# EAGLE board CarrerAI_BB_V1.0 (EAGLE 7.7.0), part 1 of 2
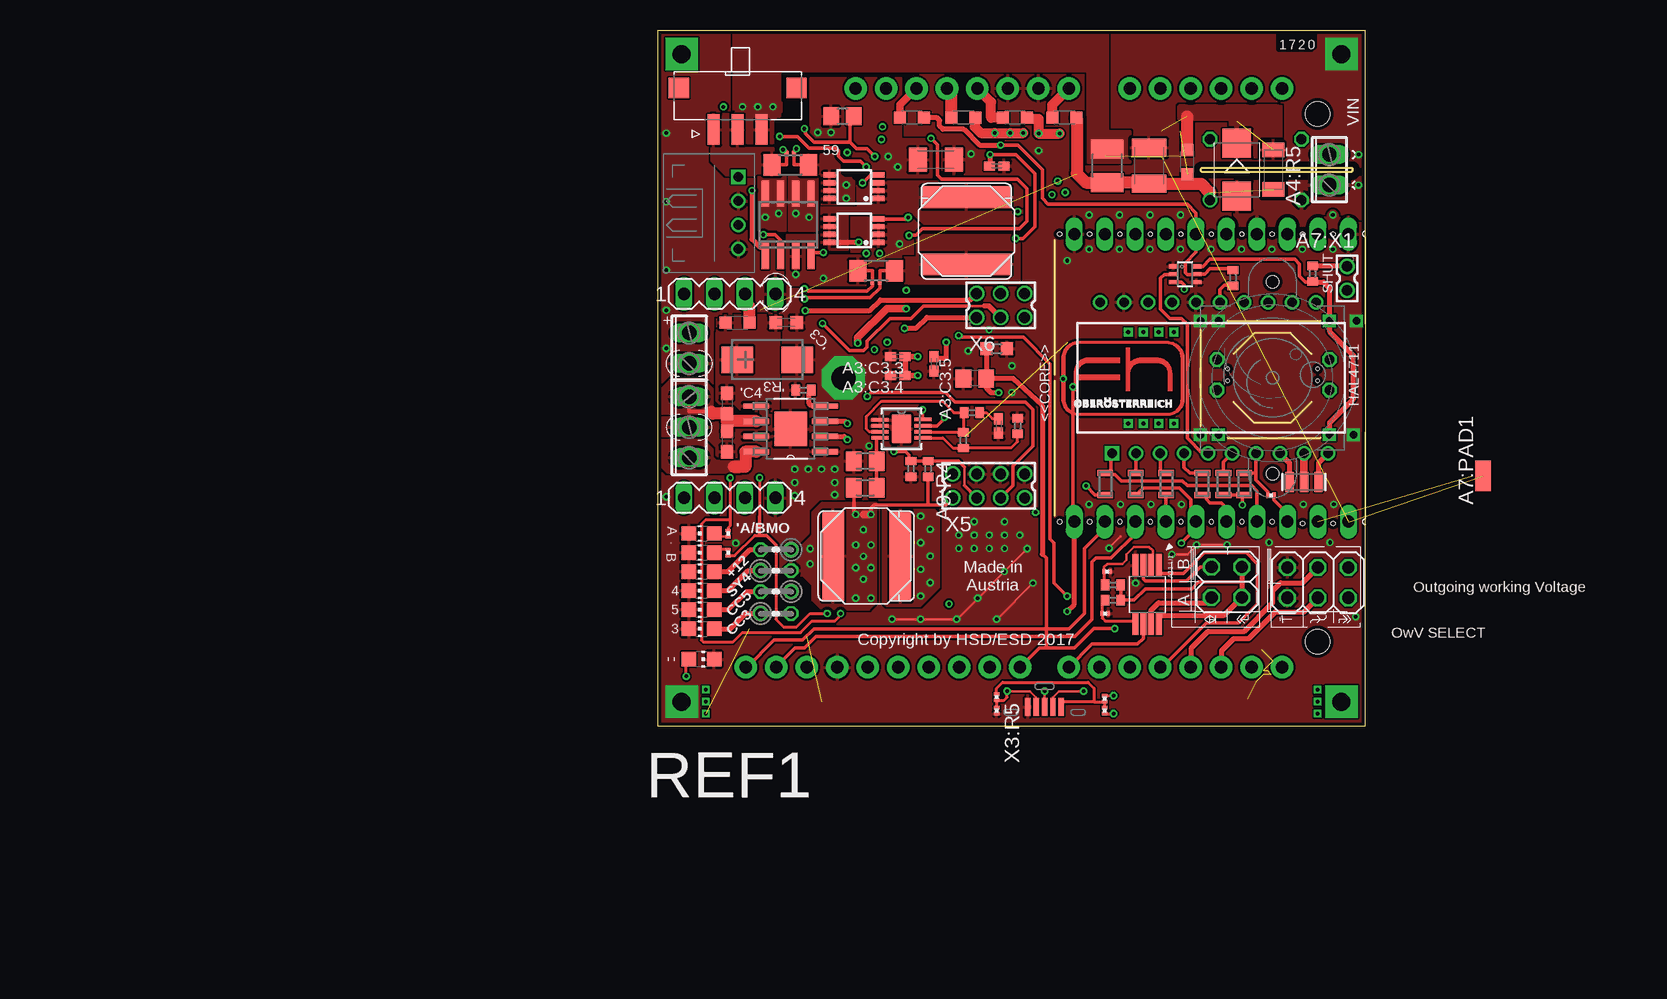
[diagram p0: board, top side]
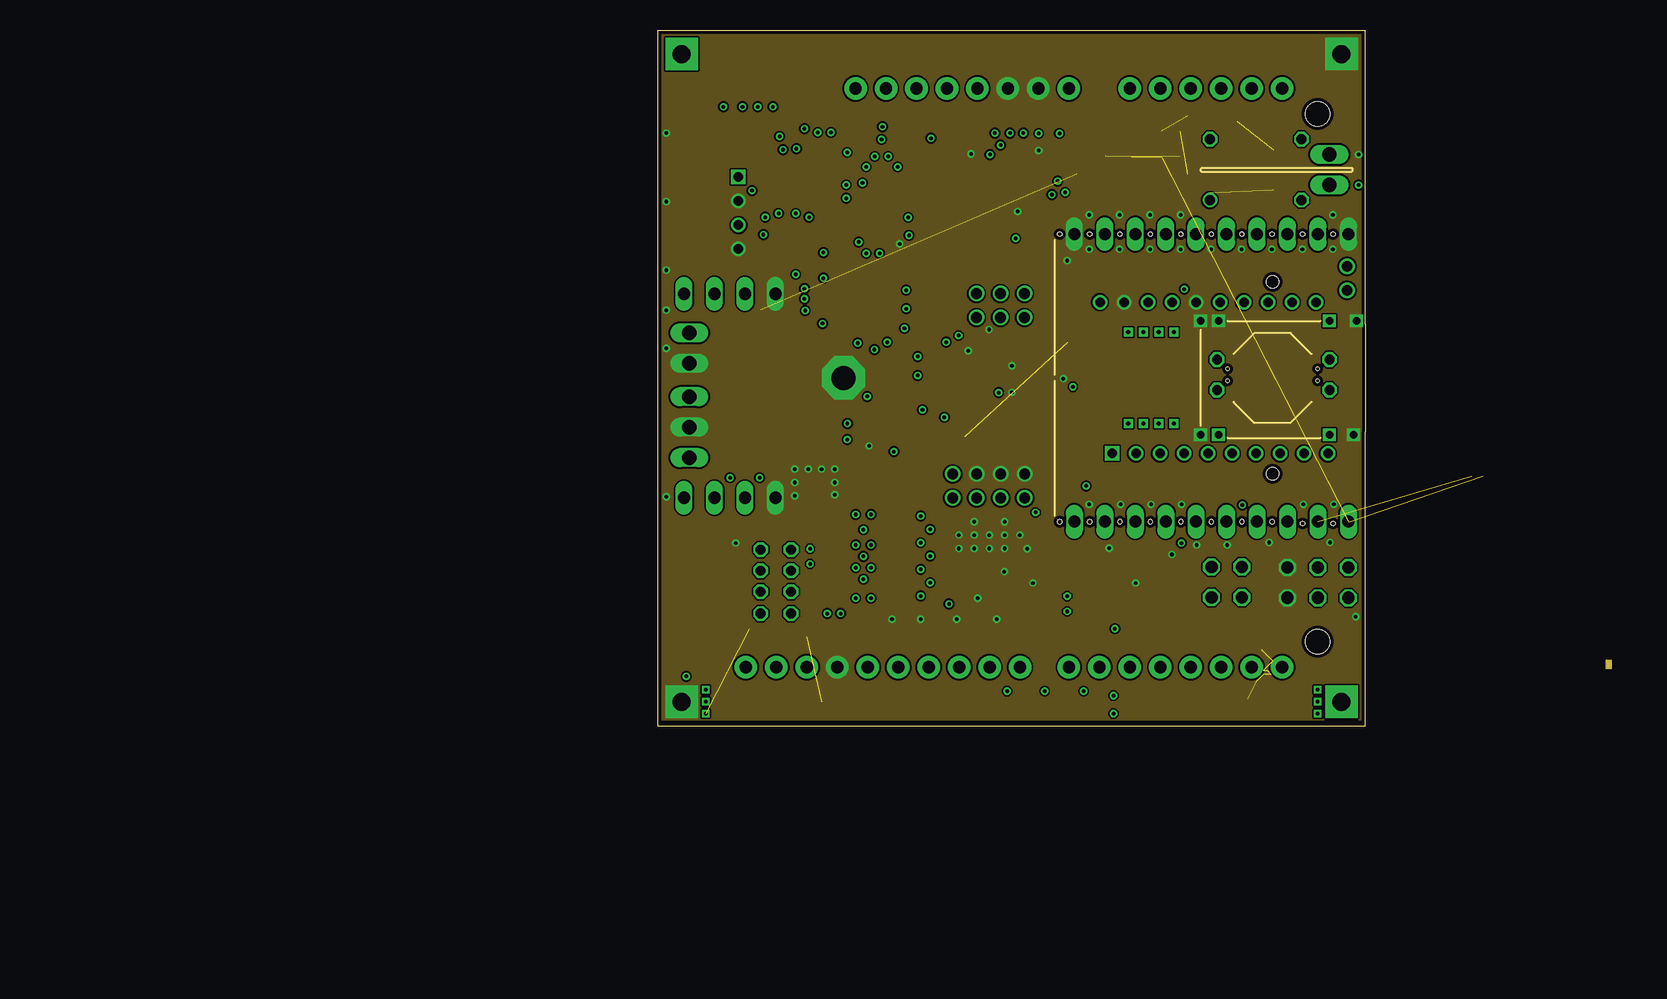
[diagram p1: board, inner layer Route2]
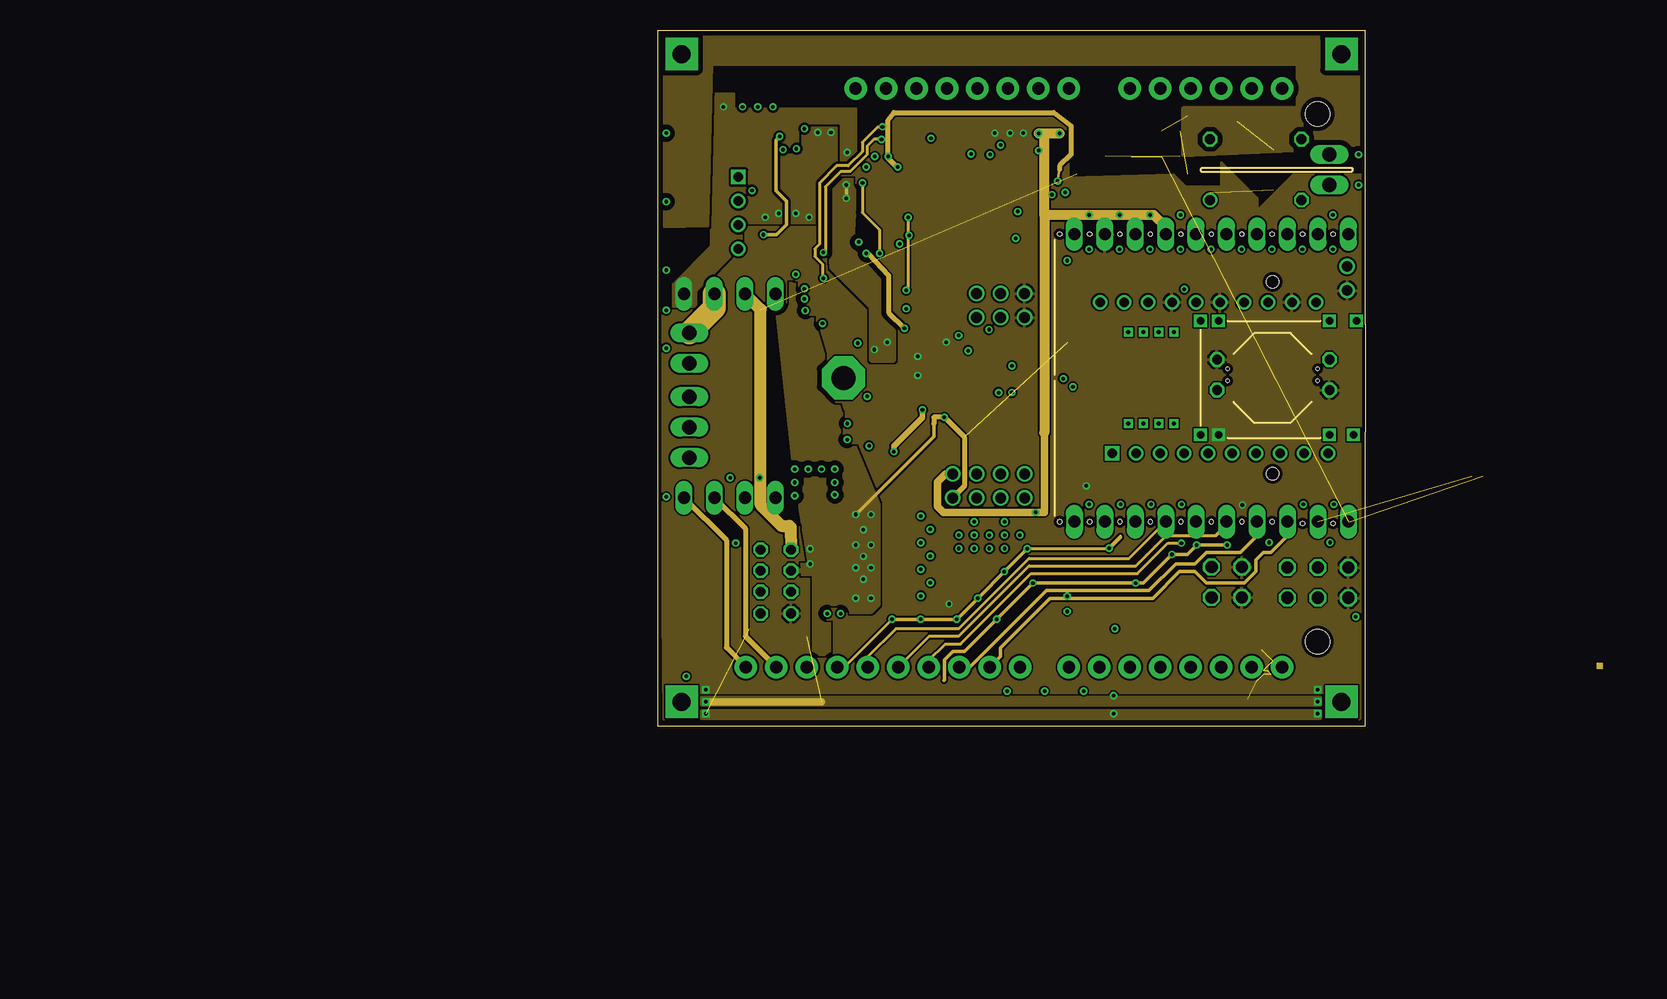
[diagram p2: board, inner layer Route15]
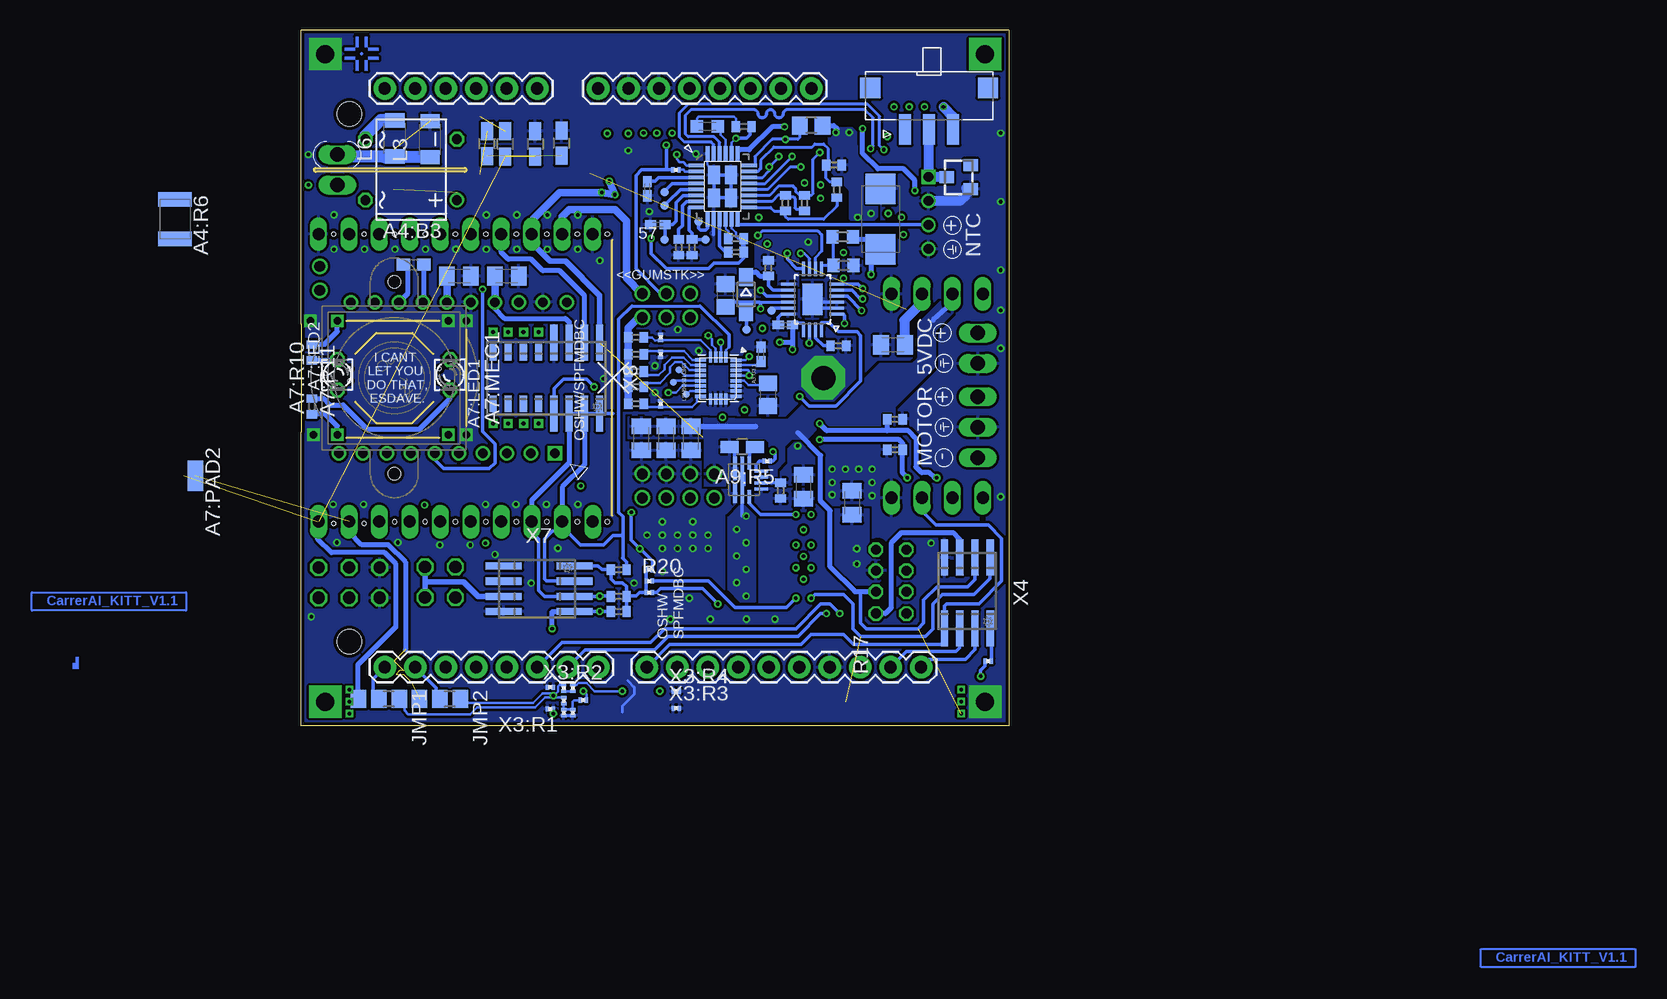
[diagram p3: board, bottom side, seen from below]

Size 59 x 58 mm. Coordinates in mm from the lower left corner, seen from the top.
Outline: 0,58 0,0 59,0 59,24.5 59,33.5 59,58 0,58
Copper layers (1+2*15+16): Top 0.035mm / dielectric 0.38mm / Route2 0.035mm / dielectric 0.71mm / Route15 0.035mm / dielectric 0.38mm / Bottom 0.035mm
Design rules "PCB-POOL Standard_ML4": minimum track width 0.15mm, minimum drill 0.3mm, track to track 0.15mm, track to pad 0.15mm, pad to pad 0.15mm, via to via 0.15mm, smd to smd 0.15mm, copper to edge 0.3mm, drill to drill 0.2mm, minimum pad ring 0.2mm, minimum via ring 0.15mm, stop-mask expansion 0.075mm, vias tented up to drill 0mil, thermal gap 0.2mm
Holes 0.35 mm at 35.99,40.98 38.53,40.98 41.07,40.98 43.61,40.98 46.15,40.98 48.69,40.98 51.23,40.98 53.77,40.98 56.31,40.98 56.31,16.85 53.77,16.85 51.23,17.01 48.69,17.01 46.15,17.01 43.61,17.01 41.07,17.01 38.53,17.01 35.99,17.01 33.49,40.98 33.49,17.01
Holes 2 mm at 55,7 55,51
Holes 0.3 mm at 154.11,83.26 47.5,29.75 47.5,28.75 55,29.75 55,28.75
tRestrict: 11 lines
bRestrict: area 68.5,9.5 to 81.6,11.2; area 21.4,19.8 to 21.8,21.2; area 31,26.4 to 31.2,31.3; area 30.9,31.9 to 31,32.8; area 10.3,14.1 to 11.6,15.4; area -52.3,-20.2 to -39.2,-18.5; area 77,7.1 to 77.1,7.2; area 76.7,7.1 to 76.8,7.2; area 76.5,7.3 to 76.6,7.4; area 76.5,7.6 to 76.6,7.7; area 76.7,7.6 to 76.8,7.7; area 77,7.6 to 77.1,7.7; area 76.5,5.7 to 76.6,5.8; area 77,5.7 to 77.1,5.8; area 76.5,5.2 to 76.6,5.3; area 77,5.2 to 77.1,5.3; area 78.9,5.2 to 79,5.3; area 78.6,5.5 to 78.7,5.6; area 78.4,5.7 to 78.5,5.8; area 78.9,5.7 to 79,5.8; area 78.7,7.1 to 78.8,7.2; area 78.5,7.3 to 78.6,7.4; area 78.2,7.6 to 78.3,7.7; area 78.7,7.6 to 78.8,7.7; 7 lines
Milling: 16 lines

## Footprints (pad centres in the part's own frame; a part is rotated, then mirrored left to right if it is on the bottom)
C0805K = smd 1.3 x 1.6: 1 -1,0; 2 1,0
C0603K = smd 1.05 x 1.08: 1 -0.875,0; 2 0.875,0
CT6032 = smd 2.6 x 2.2: + -2.5,0; - 2.5,0
C0603 = smd 1.1 x 1: 1 -0.85,0; 2 0.85,0
L2012C = smd 1 x 1: 1 -1,0; 2 1,0
R0402 = smd 0.7 x 0.9: 1 -0.65,0; 2 0.65,0
HSOP8 = smd 2.15 x 0.45: 1 -2.857,1.905; 2 -2.857,0.635; 3 -2.857,-0.635; 4 -2.857,-1.905; 5 2.857,-1.905; 6 2.857,-0.635; 7 2.857,0.635; 8 2.857,1.905 | smd 2.7 x 2.9: THERMAL 0,0
C0805 = smd 1.3 x 1.5: 1 -0.95,0; 2 0.95,0
C0402K = smd 0.925 x 0.74: 1 -0.6,0; 2 0.6,0
R0201 = smd 0.28 x 0.43: 1 -0.255,0; 2 0.255,0
R0603 = smd 1 x 1.1: 1 -0.85,0; 2 0.85,0
KITT.IC_LGA-24 = smd 0.29 x 0.9: 1 -0.015,2.7; 6 -0.025,-0.25; 7 0.405,-0.25; 8 0.835,-0.25; 9 1.264,-0.25; 10 1.694,-0.25; 11 2.124,-0.25; 12 2.554,-0.25; 13 2.985,-0.25; 18 2.985,2.7; 19 2.554,2.7; 20 2.124,2.7; 21 1.694,2.7; 22 1.264,2.7; 23 0.835,2.7; 24 0.405,2.7 | smd 0.9 x 0.29: 2 -0.266,1.87; 3 -0.266,1.44; 4 -0.266,1.01; 5 -0.266,0.58; 14 3.224,0.58; 15 3.224,1.01; 16 3.224,1.44; 17 3.224,1.87
TP06R = smd 0.6 x 0.6: TP 0,0
DIL06 = drill 0.813 offset: 1 -2.54,-3.81; 2 0,-3.81; 3 2.54,-3.81; 4 2.54,3.81; 5 0,3.81; 6 -2.54,3.81
MINI_MELF-0207R = smd 1.6 x 2.5: 1 -2.25,0; 2 2.25,0
DB = drill 0.813: + -2.54,-3.81 | drill 0.813 octagon: - 2.54,-3.81; AC1 2.54,3.81; AC2 -2.54,3.81
C1210K = smd 1.5 x 2.9: 1 -1.5,0; 2 1.5,0
SMB = smd 2.4 x 2.4: A 2.2,0; C -2.2,0
R1210 = smd 1.6 x 2.7: 1 -1.4,0; 2 1.4,0
R0805W = smd 1.5 x 1: 1 -1.052,0; 2 1.052,0
CT/CN1206 = smd 1.2 x 1.8: 1 -1.65,0; 2 1.65,0
CT/CN1210 = smd 1.2 x 2.8: 1 -1.65,0; 2 1.65,0
C1206K = smd 1.5 x 2: 1 -1.5,0; 2 1.5,0
R1206-KELV = smd 1.422 x 1.778: + -1.524,0; - 1.524,0 | smd 0.305 x 0.406: K+ -0.318,-0.953; K- 0.318,-0.953
R0805 = smd 1.3 x 1.5: 1 -0.95,0; 2 0.95,0
SOIC8 = smd 0.6 x 2.2: 1 -1.905,-2.6; 2 -0.635,-2.6; 3 0.635,-2.6; 4 1.905,-2.6; 5 1.905,2.6; 6 0.635,2.6; 7 -0.635,2.6; 8 -1.905,2.6
QFN-28_UFD-L_LONG = smd 1.3 x 0.3: 1 -2.202,1.75; 2 -2.202,1.25; 3 -2.202,0.75; 4 -2.202,0.25; 5 -2.202,-0.25; 6 -2.202,-0.75; 7 -2.202,-1.25; 8 -2.202,-1.75; 15 2.202,-1.75; 16 2.202,-1.25; 17 2.202,-0.75; 18 2.202,-0.25; 19 2.202,0.25; 20 2.202,0.75; 21 2.202,1.25; 22 2.202,1.75 | smd 0.3 x 1.3: 9 -1.25,-2.702; 10 -0.75,-2.702; 11 -0.25,-2.702; 12 0.25,-2.702; 13 0.75,-2.702; 14 1.25,-2.702; 23 1.25,2.702; 24 0.75,2.702; 25 0.25,2.702; 26 -0.25,2.702; 27 -0.75,2.702; 28 -1.25,2.702 | smd 1.016 x 1.524: EP-NE 0.714,0.953; EP-NW -0.714,0.953; EP-SE 0.714,-0.953; EP-SW -0.714,-0.953
TP07R = smd 0.7 x 0.7: TP 0,0
C0402 = smd 0.7 x 0.9: 1 -0.65,0; 2 0.65,0
C/6032-28R = smd 2.55 x 2.5: + 2.525,0; - -2.525,0
SOD323-W = smd 1.5 x 1.2: A 1.45,0; C -1.45,0
TAIYO-YUDEN.NRS8030T4R7MJGJ = smd 1.8 x 7.5: 1 -2.54,0; 2 3.06,0
MSOP8 = smd 0.45 x 1: 1 -0.975,-2.05; 2 -0.325,-2.05; 3 0.325,-2.05; 4 0.975,-2.05; 5 0.975,2.05; 6 0.325,2.05; 7 -0.325,2.05; 8 -0.975,2.05
QFN50P-LONG = smd 1.2 x 0.25: 1 -2.03,1.25; 2 -2.03,0.75; 3 -2.03,0.25; 4 -2.03,-0.25; 5 -2.03,-0.75; 6 -2.03,-1.25; 11 2.03,-1.25; 12 2.03,-0.75; 13 2.03,-0.25; 14 2.03,0.25; 15 2.03,0.75; 16 2.03,1.25 | smd 0.25 x 1.2: 7 -0.75,-2.53; 8 -0.25,-2.53; 9 0.25,-2.53; 10 0.75,-2.53; 17 0.75,2.53; 18 0.25,2.53; 19 -0.25,2.53; 20 -0.75,2.53 | smd 1.65 x 2.65: 21 0,0
C1608 = smd 1.1 x 1: 1 -0.85,0; 2 0.85,0
6410-02 = drill 1.016 long: 1 1.27,0; 2 -1.27,0
LZR181 = drill 0.813 octagon: A -1.27,0; K 1.27,0
MEC.HAL4711 = hole 1: -8,0; 8,0
SMD1,27-2,54 = smd 1.27 x 2.54: 1 0,0
MINI_MELF-0102R = smd 0.5 x 1.3: 1 -0.9,0; 2 0.9,0
ADNS-3080 = drill 0.8 square: 1 -8.126,-6.3 | drill 0.8: 2 -6.126,-6.3; 3 -4.126,-6.3; 4 -2.126,-6.3; 5 -0.126,-6.3; 6 1.874,-6.3; 7 3.874,-6.3; 8 5.874,-6.3; 9 7.874,-6.3; 10 9.874,-6.3; 11 8.874,6.3; 12 6.874,6.3; 13 4.874,6.3; 14 2.874,6.3; 15 0.874,6.3; 16 -1.126,6.3; 17 -3.126,6.3; 18 -5.126,6.3; 19 -7.126,6.3; 20 -9.126,6.3
SC70-6 = smd 0.35 x 0.8: 1 -0.65,-0.95; 2 0,-0.95; 3 0.65,-0.95; 4 0.65,0.95; 5 0,0.95; 6 -0.65,0.95
87758-0216 = drill 0.9 pad 1.27: 1 0,-1; 2 0,1
RESON-SMD = smd 0.7 x 1.7: 1 -1.2,0; 2 0,0; 3 1.2,0
PAD40MIL.BREAK = drill 1 pad 1.016 long: P$1 0,0
9-VQFN-HR_LONG = smd 1.6 x 0.3: 1 -1.145,0.77 | smd 3.9 x 0.3: 2 0,0.17 | smd 1.1 x 0.3: 3 -1.4,-0.425; 8 1.4,-0.425 | smd 0.25 x 1.1: 4 -0.75,-1.425; 5 -0.25,-1.425; 6 0.25,-1.425; 7 0.75,-1.425 | smd 1.95 x 0.3: 9 0.97,0.77
M0805 = smd 1.3 x 1.6: 1 -0.95,0; 2 0.95,0
DFN-8_DD = smd 1.4 x 0.28: 1 -1.78,0.75; 2 -1.78,0.25; 3 -1.78,-0.25; 4 -1.78,-0.75; 5 1.78,-0.75; 6 1.78,-0.25; 7 1.78,0.25; 8 1.78,0.8 | smd 1.65 x 2.38: EP 0,0
SOP65P490X110-8N = smd 1.88 x 0.5: 1 -2.415,0.975; 2 -2.415,0.325; 3 -2.415,-0.325; 4 -2.415,-0.975; 5 2.415,-0.975; 6 2.415,-0.325; 7 2.415,0.325; 8 2.415,0.975
CHIP-LED0805 = smd 1.2 x 1.2: A 0,-1.05; C 0,1.05
TO236 = smd 1 x 1.2: 1 -1,-1; 2 0,1; 3 1,-1
A0R-JMP = smd 1.5 x 1.3: 1 0,1.7; 2 0,0; 3 0,-1.7
JP2Q = drill 0.914 octagon: 1 -1.27,-1.27; 2 -1.27,1.27; 3 1.27,-1.27; 4 1.27,1.27
2X02 = drill 1.016 octagon: 1 -1.27,-1.27; 2 -1.27,1.27; 3 1.27,-1.27; 4 1.27,1.27
L3216C = smd 1.2 x 1.6: 1 -1.5,0; 2 1.5,0
0204V = drill 0.813 octagon: 1 -1.27,0; 2 1.27,0
SW_SS312SAH4-R = smd 2.55 x 1: 1 1.525,-2; 2 1.525,0; 3 1.525,2 | smd 1.7 x 1.7: P$1 -1.95,-4.9; P$2 -1.95,4.9
CTS-219-04 = smd 1.13 x 2.44: 1 -3.81,-4.3; 2 -1.27,-4.3; 3 1.27,-4.3; 4 3.81,-4.3; 5 3.81,4.3; 6 1.27,4.3; 7 -1.27,4.3; 8 -3.81,4.3
255SB = drill 1.118 long: 1 -3.81,0; 2 0,0; 3 3.81,0
9450-2 = drill 0.813 octagon: 1 -2.54,-1.27; 2 0,-1.27; 3 2.54,-1.27; 4 -2.54,1.27; 5 0,1.27; 6 2.54,1.27
MA04-1 = drill 1.016 long: 1 -3.81,0; 2 -1.27,0; 3 1.27,0; 4 3.81,0
JST-PHR-4 = drill 0.8 square: 1 0,0 | drill 0.8: 2 -2,0; 3 -4,0; 4 -6,0
2X03 = drill 1.016 octagon: 1 -2.54,-1.27; 2 -2.54,1.27; 3 0,-1.27; 4 0,1.27; 5 2.54,-1.27; 6 2.54,1.27
3POL254 = drill 1.2 long: 1 -2.54,0; 2 0,0; 3 2.54,0
2POL254 = drill 1.2 long: 1 -1.27,0; 2 1.27,0
POS-5 = smd 0.45 x 1.5: 1 1.4,-0.44; 2 2.1,-0.44; 3 2.8,-0.44; 4 3.5,-0.44; 5 4.2,-0.44
SYSTEWI-BR1.SOIC8C = smd 0.6 x 3: 1 -1.905,2.973; 2 -0.635,2.973; 3 0.635,2.973; 4 1.905,2.973; 5 1.905,-2.927; 6 0.635,-2.927; 7 -0.635,-2.927; 8 -1.905,-2.927
87758-0816 = drill 0.9 pad 1.27: 1 -3,-1; 2 -3,1; 3 -1,-1; 4 -1,1; 5 1,-1; 6 1,1; 7 3,-1; 8 3,1
87758-0616 = drill 0.9 pad 1.27: 1 -2,-1; 2 -2,1; 3 0,-1; 4 0,1; 5 2,-1; 6 2,1
SYSTEWI-BR1.SOIC16 = smd 0.6 x 3: 1 -1.905,2.973; 2 -0.635,2.973; 3 0.635,2.973; 4 1.905,2.973; 5 1.905,-2.927; 6 0.635,-2.927; 7 -0.635,-2.927; 8 -1.905,-2.927 | smd 0.6 x 1.4: G1 3.175,2.173; G2 4.445,2.173; G3 5.715,2.173; G4 6.985,2.173; G5 6.985,-2.127; G6 5.715,-2.127; G7 4.445,-2.127; G8 3.175,-2.127 | drill 0.35 square: T1 3.175,3.81; T2 4.445,3.81; T3 5.715,3.81; T4 6.985,3.81; T5 6.985,-3.81; T6 5.715,-3.81; T7 4.445,-3.81; T8 3.175,-3.81
AU_PINS = drill 1.016 pad 1.88: 3.3V -8.89,-24.13; 5V -6.35,-24.13; ADC.0 6.35,-24.13; ADC.1 8.89,-24.13; ADC.2 11.43,-24.13; ADC.3 13.97,-24.13; ADC.4 16.51,-24.13; ADC.5 19.05,-24.13; AREF -20.574,24.13; GND2 -1.27,-24.13; GND3 -3.81,-24.13; GND.1 -18.034,24.13; I/OREF -13.97,-24.13; IO.0 19.05,24.13; IO.1 16.51,24.13; IO.2 13.97,24.13; IO.3 11.43,24.13; IO.4 8.89,24.13; IO.5 6.35,24.13; IO.6 3.81,24.13; IO.7 1.27,24.13; IO.8 -2.794,24.13; IO.9 -5.334,24.13; IO.10 -7.874,24.13; IO.11 -10.414,24.13; IO.12 -12.954,24.13; IO.13 -15.494,24.13; N/C -16.51,-24.13; RESET -11.43,-24.13; SCL -25.654,24.13; SDA -23.114,24.13; VIN 1.27,-24.13

## Placement (x,y rotation side)
A2:C1  4.7uF/25V  [C0805K]  9.68,31.75 180 bottom
A2:C2  100nF/25V⇤  [C0603K]  10.72,33.61 0 top
A2:C3  47uF/25V⇤  [CT6032]  9.13,30.51 0 top
A2:C4  220nF/25V⇤  [C0603]  5.76,26.86 270 top
A2:C5  220nF/25V⇤  [C0603]  5.76,23.69 270 top
A2:L1  BEAD  [L2012C]  6.63,33.61 0 top
A2:R1  10kR/⎑  [R0402]  9.53,25.54 0 bottom
A2:R2  10kR/⎑  [R0402]  9.53,23 180 bottom
A2:R3  2k2R  [R0402]  12.14,27.97 180 top
A2:U1  DRV8871  [HSOP8]  11.08,24.74 180 top
A3:C3.1  10nF/⇤  [C0805]  20.12,27.6 270 bottom
A3:C3.2  100nF/⇤  [C0402K]  20.68,30.95 90 bottom
A3:C3.3  100nF/⇤  [C0402K]  20,30.78 180 top
A3:C3.4  100nF/⇤  [C0402K]  20,29.19 180 top
A3:C3.5  100nF/⇤  [C0402K]  23.02,30.16 270 top
A3:C3.XX  10nF/⇤  [C0805]  26.43,28.96 180 top
A3:R3.1  10kR/⎒  [R0402]  31.11,29.53 0 bottom
A3:R3.2  10kR/⎒  [R0402]  31.11,28.26 0 bottom
A3:R3.3  10kR/⎑  [R0201]  29.05,32.38 90 bottom
A3:R3.4  10kR/⎑  [R0201]  29.05,30.96 270 bottom
A3:R3.5  10kR/⎒  [R0402]  31.11,30.96 0 bottom
A3:R3.6  10kR/⎒  [R0402]  31.11,32.37 0 bottom
A3:R3.9  60R/⇤  [R0603]  28.26,31.43 0 top
A3:R3.10  10k/⎒  [R0402]  31.11,26.83 0 bottom
A3:R3.11  10kR/⎑  [R0201]  29.05,26.83 90 bottom
A3:U3.1  LSM9DS1LONG  [KITT.IC_LGA-24]  25.48,30.46 270 bottom
A3:☇1  PTR1TP06R  [TP06R]  27.54,29.67 0 bottom
A3:☇2  PTR1TP06R  [TP06R]  28.02,28.64 0 bottom
A3:☇3  PTR1TP06R  [TP06R]  26.91,27.61 0 bottom
A4:A1:OK2  Si8710  [DIL06]  143.36,18.73 0 top  (outside the outline)
A4:A1:R13  [MINI_MELF-0207R]  150.32,27.97 0 top  (outside the outline)
A4:A1:R14  [MINI_MELF-0207R]  133.25,28.93 0 top  (outside the outline)
A4:A1:R16  [R0402]  143.81,22.88 0 top  (outside the outline)
A4:B3  DBDB102G  [DB]  49.85,46.35 90 bottom
A4:C1  10uF  [C1210K]  40.96,46.67 90 top
A4:D1  [SMB]  48.26,46.35 270 top
A4:F1  1.5A->750mA  [R1210]  37.47,46.67 90 top
A4:L1  BEAD  [L2012C]  44.13,46.99 270 top
A4:R1  10kR  [R0805W]  42,48.5 90 bottom
A4:R2  2.2kR  [R0805W]  39.5,48.5 270 bottom
A4:R3  10kR  [R0805W]  43.52,48.53 90 bottom
A4:R4  2.2kR  [R0805W]  37.33,48.56 270 bottom
A4:R5  VARISTORCN1206  [CT/CN1206]  51.32,46.35 270 top
A4:R6  VARISTORCN1210  [CT/CN1210]  69.53,42.23 270 bottom  (outside the outline)
A5:C1  47nF/⇤  [C0603K]  25.16,49.96 0 bottom
A5:C2  100uF/~5V  [C1206K]  23.18,47.18 0 top
A5:C4  1uF/⇤  [C0402K]  28.26,46.66 0 top
A5:C5  10nF/⇤  [C0402K]  30.16,44.77 270 bottom
A5:C6  10nF/⇤  [C0402K]  29.29,41.78 180 bottom
A5:R1  8.2mR/⚻  [R1206-KELV]  11.05,46.76 180 top
A5:R2  16kR/⇤  [R0402]  22.13,49.94 0 bottom
A5:R3  1MR  [R0805]  16.51,50.04 180 bottom
A5:R4  270kR  [R0402]  14.61,46.74 0 bottom
A5:R5  5mR  [R0805]  15.4,50.8 180 top
A5:R6  100kR/1%  [R0402]  14.37,44.67 90 bottom
A5:R7  27kR/1%  [R0402]  18.65,43.56 270 bottom
A5:R8  68kR/1%  [R0402]  17.07,43.56 90 bottom
A5:R9  1kR/⇤  [R0402]  26.43,39.88 90 bottom
A5:R10  1kR/⇤  [R0402]  27.54,39.88 90 bottom
A5:R11  10kR/⎒  [R0402]  22.78,40.59 0 bottom
A5:R12  10kR/⎒  [R0402]  22.78,39.48 0 bottom
A5:T1  IRF7328  [SOIC8]  10.88,41.75 0 top
A5:U1  LTC4000LTC4000EUFD-ARMIN  [QFN-28_UFD-L_LONG]  23.89,44.96 0 bottom
A5:☇1  PTR1TP07R  [TP07R]  25.88,42.02 180 bottom
A5:☇2  PTR1TP07R  [TP07R]  28.73,43.37 180 bottom
A5:☇3  PTR1TP07R  [TP07R]  28.74,44.47 180 bottom
A5:☇6  PTR1TP07R  [TP07R]  25.32,40.52 180 bottom
A5:☇7  PTR1TP07R  [TP07R]  28.73,40.51 180 bottom
A6:C1  1nF/⇤  [C0402]  14.25,31.67 0 bottom
A6:C2  4.7uF/⇤  [C0805]  23.65,35.86 90 bottom
A6:C3  100nF/⇤  [C0402]  20.07,38.14 90 bottom
A6:C4  100uF  [C/6032-28R]  10.72,42.23 270 bottom
A6:C5  1uF/⇤  [C0402K]  18.65,33.42 180 bottom
A6:D1  30VBD,0.2A  [SOD323-W]  21.94,35.95 270 bottom
A6:L1  10uH  [TAIYO-YUDEN.NRS8030T4R7MJGJ]  25.73,41.01 90 top
A6:R1  15mR/25mW⚻  [R1206-KELV]  18.2,37.92 0 top
A6:R2  51kR/1%  [R0603]  13.89,40.75 180 bottom
A6:R3  12kR/1%  [R0603]  13.81,38.37 0 bottom
A6:T1  XX  [MSOP8]  16.37,44.93 90 top
A6:T2  XX  [MSOP8]  16.37,41.28 90 top
A6:U1  LTC3891QFN50P-LONG  [QFN50P-LONG]  16.39,35.55 180 bottom
A6:☇1  PTR1TP07R  [TP07R]  19.81,34.6 270 bottom
A6:☇5  PTR1TP07R  [TP07R]  21.91,33 180 bottom
A7:C1  2.2uF/⇤  [C1608]  49.64,38.44 0 bottom
A7:C2  100nF/⇤  [C0805K]  41.89,37.48 0 bottom
A7:C3  100nF/⇤  [C0805K]  45.86,37.48 0 bottom
A7:DCL1  DCL.OSH'3MM-SLK'  [DCL.LOGO-OSH.3MM]  65.98,15.46 0 bottom  (outside the outline)
A7:DCL2  DCL.OSH'3MM-SLK'  [DCL.LOGO-OSH.3MM]  35.18,22.39 0 top
A7:J2  22-27-2021-02  [6410-02]  142.74,75.49 0 top  (outside the outline)
A7:LED1  [LZR181]  46.62,29.25 270 bottom
A7:LED2  [LZR181]  56,29.25 90 bottom
A7:MEC1  MEC.HAL4711/OPTICS  [MEC.HAL4711]  51.25,29 270 bottom
A7:PAD1  [SMD1,27-2,54]  68.8,20.82 0 top  (outside the outline)
A7:PAD2  [SMD1,27-2,54]  67.84,20.82 180 bottom  (outside the outline)
A7:R1  10kR/⎒  [MINI_MELF-0102R]  37.31,20.14 90 top
A7:R2  100R/⇤  [MINI_MELF-0102R]  39.85,20.14 90 top
A7:R3  100R/⇤  [MINI_MELF-0102R]  42.39,20.14 90 top
A7:R4  100R/⇤  [MINI_MELF-0102R]  45.4,20.14 90 top
A7:R5  10kR/⎒  [MINI_MELF-0102R]  47.15,20.14 90 top
A7:R6  10kR/⎒  [MINI_MELF-0102R]  48.9,20.14 90 top
A7:R7  200R  [R0402]  54.58,37.68 90 top
A7:R8  0R  [R0201]  51.12,19.21 0 top
A7:R9  10kR/⎒  [R0402]  47.96,37.33 90 top
A7:R10  200R  [R0402]  58.12,26.62 90 bottom
A7:R11  200R  [R0402]  58.12,31.12 270 bottom
A7:U1  ADNS-3080  [ADNS-3080]  46,29 0 top
A7:U2  SI1922EDH  [SC70-6]  43.95,37.64 270 top
A7:X1  87758-0216  [87758-0216]  57.47,37.29 180 top
A7:Y1  24MHz  [RESON-SMD]  53.87,20.31 180 top
A7:⌁1  SINGLEPAD40MIL-BREAK  [PAD40MIL.BREAK]  34.72,40.98 0 top
A7:⌁2  SINGLEPAD40MIL-BREAK  [PAD40MIL.BREAK]  47.42,40.98 0 top
A7:⌁3  SINGLEPAD40MIL-BREAK  [PAD40MIL.BREAK]  39.8,40.98 0 top
A7:⌁4  SINGLEPAD40MIL-BREAK  [PAD40MIL.BREAK]  37.26,40.98 0 top
A7:⌁5  SINGLEPAD40MIL-BREAK  [PAD40MIL.BREAK]  42.34,40.98 0 top
A7:⌁6  SINGLEPAD40MIL-BREAK  [PAD40MIL.BREAK]  44.88,40.98 0 top
A7:⌁7  SINGLEPAD40MIL-BREAK  [PAD40MIL.BREAK]  49.96,40.98 0 top
A7:⌁8  SINGLEPAD40MIL-BREAK  [PAD40MIL.BREAK]  52.5,40.98 0 top
A7:⌁9  SINGLEPAD40MIL-BREAK  [PAD40MIL.BREAK]  55.04,40.98 0 top
A7:⌁10  SINGLEPAD40MIL-BREAK  [PAD40MIL.BREAK]  57.58,40.98 0 top
A7:⌁11  SINGLEPAD40MIL-BREAK  [PAD40MIL.BREAK]  57.58,17.01 180 top
A7:⌁12  SINGLEPAD40MIL-BREAK  [PAD40MIL.BREAK]  55.04,17.01 180 top
A7:⌁13  SINGLEPAD40MIL-BREAK  [PAD40MIL.BREAK]  52.5,17.01 180 top
A7:⌁14  SINGLEPAD40MIL-BREAK  [PAD40MIL.BREAK]  49.96,17.01 180 top
A7:⌁15  SINGLEPAD40MIL-BREAK  [PAD40MIL.BREAK]  47.42,17.01 180 top
A7:⌁16  SINGLEPAD40MIL-BREAK  [PAD40MIL.BREAK]  44.88,17.01 180 top
A7:⌁17  SINGLEPAD40MIL-BREAK  [PAD40MIL.BREAK]  42.34,17.01 180 top
A7:⌁18  SINGLEPAD40MIL-BREAK  [PAD40MIL.BREAK]  39.8,17.01 180 top
A7:⌁19  SINGLEPAD40MIL-BREAK  [PAD40MIL.BREAK]  37.26,17.01 180 top
A7:⌁20  SINGLEPAD40MIL-BREAK  [PAD40MIL.BREAK]  34.72,17.01 180 top
A9:C1  10uF/⇤  [C0805K]  13.1,18.58 90 bottom
A9:C2  22uF/⇤  [C0805K]  26.53,23.95 270 bottom
A9:C3  22uF/⇤  [C0805K]  28.6,23.95 270 bottom
A9:C4  22uF/⇤  [C0805K]  30.66,23.95 270 bottom
A9:C5  100nF  [C0805K]  17.14,19.91 90 bottom
A9:L1  1uH  [TAIYO-YUDEN.NRS8030T4R7MJGJ]  17.17,14.14 0 top
A9:R1  10kR/⎒  [R0805W]  22.25,23.24 180 bottom
A9:R2  0R/⎵  [R0402]  19.05,19.59 270 bottom
A9:R3  1MR/⎵  [R0402]  21.11,21.41 90 top
A9:R4  ~10kR/⎵  [R0402]  22.54,21.41 270 top
A9:R5  [R0201]  20.16,22.05 180 bottom
A9:U1  TPS6123X5V-LONG  [9-VQFN-HR_LONG]  22.09,20.49 90 bottom
A10:C1  1uF/⇤  [C0402K]  28.42,24.99 270 top
A10:R1  430R  [R0402]  26.19,26.1 180 top
A10:R2  25kR  [R0402]  25.48,23.8 270 top
A10:R3  XXMR  [M0805]  17.3,22.05 0 top
A10:R4  XXMR  [M0805]  17.3,19.83 180 top
A10:R7  2.32MR  [R0402]  30,24.99 270 top
A10:REF2  REF.LOGO.UASUAS-GRADE  [DCL.LOGO.FHOOE-6MM-S]  38.8,28.96 0 top
A10:U1  LTC1540CDD-LONG  [DFN-8_DD]  20.32,24.75 0 top
A11:U1  2NANDSOP8  [SOP65P490X110-8N]  40.8,10.94 270 top
AMO  MOTO  [CHIP-LED0805]  3.65,16.02 90 top
BMO  MOTO  [CHIP-LED0805]  3.65,14.43 90 top
D2  MMBZXAL  [TO236]  4.21,45.72 90 bottom
JMP1  0R-JUMPA  [A0R-JMP]  52.55,2.22 270 bottom
JMP2  0R-JUMPA  [A0R-JMP]  47.47,2.22 270 bottom
JP1  [JP2Q]  142.24,79.85 0 top  (outside the outline)
JP4  [2X02]  47.44,11.97 270 top
L1  BEAD/0R/⎵  [L2012C]  29.77,50.67 180 top
L2  BEAD/0R/⎵  [L2012C]  25.48,50.67 180 top
L3  CM CHOKE  [L3216C]  48.26,48.9 90 bottom
L4  BEAD/0R/⎵  [L2012C]  33.89,50.67 180 top
L5  BEAD/0R/⎵  [L2012C]  21.19,50.67 180 top
L6  CM CHOKE  [L3216C]  51.21,48.94 90 bottom
LED1  VINS  [CHIP-LED0805]  3.65,12.84 90 top
LED2  DC3  [CHIP-LED0805]  3.65,8.08 90 top
LED3  DC5  [CHIP-LED0805]  3.65,9.67 90 top
LED4  SY4  [CHIP-LED0805]  3.65,11.26 90 top
LED5  PROBLEM  [CHIP-LED0805]  3.65,5.54 270 top
R1  100R  [0204V]  9.84,9.35 0 top
R2  [R0201]  27.78,46.34 0 bottom
R3  10k/⎒  [R0402]  32.54,13 180 bottom
R4  10k/⎒  [R0402]  32.54,10.78 0 bottom
R5  10k/⎒  [R0402]  32.54,9.51 0 bottom
R6  [R0201]  30,11.1 0 bottom
R7  [R0201]  30,13 0 bottom
R8  100R  [0204V]  9.84,14.67 180 top
R9  [R0201]  133.78,21.34 0 top  (outside the outline)
R10  [R0201]  134.19,26.8 0 top  (outside the outline)
R11  [R0201]  37.47,12.84 180 top
R12  [R0201]  37.31,9.35 180 top
R13  10k/⎒  [R0402]  37.94,11.73 0 top
R14  10k/⎒  [R0402]  37.94,10.46 0 top
R15  100R  [0204V]  9.84,11.18 180 top
R16  100R  [0204V]  9.84,12.92 0 top
R17  100R  [R0201]  1.75,5.38 0 bottom
R18  [R0201]  5.87,16.02 90 top
R19  [R0201]  5.87,14.43 270 top
R20  [R0201]  30,12.05 0 bottom
R21  [R0201]  147,63.66 0 top  (outside the outline)
R22  [R0201]  148.59,61.75 0 top  (outside the outline)
REF1  REF.EDULIMIT  [REF_EAGLE.EDULIMIT]  0,0 0 top
S1  SS312SAH4-R  [SW_SS312SAH4-R]  6.67,51.23 270 bottom
S2  219-04  [CTS-219-04]  107.16,15.24 0 bottom  (outside the outline)
S3  SS312SAH4-R  [SW_SS312SAH4-R]  6.67,51.23 270 top
S4  [255SB]  146.21,88.27 0 top  (outside the outline)
S5  9450-2  [9450-2]  150.81,77.79 0 top  (outside the outline)
S6  219-04  [CTS-219-04]  128.43,81.6 0 top  (outside the outline)
SV1  [MA04-1]  6,19 0 top
SV2  [MA04-1]  6,36 0 top
U$1  [PASSER-CIRCLE]  53.98,56.02 0 bottom
X1  JST-4POS-2X4POS  [JST-PHR-4]  6.73,45.74 90 top
X1.2  TACH/LAP  [2X03]  55.03,11.93 0 top
X2  [3POL254]  2.62,24.88 90 top
X2.2  VRAILS+  [2POL254]  55.99,46.34 90 top
X2.3  SoC  [2POL254]  2.62,31.47 90 top
X3:R1  [R0201]  38.24,1.39 180 bottom
X3:R2  [R0201]  38.25,3.19 0 bottom
X3:R3  [R0201]  27.75,1.44 0 bottom
X3:R4  [R0201]  27.75,2.88 0 bottom
X3:R5  [R0201]  28.25,1.25 270 top
X3:R21  [R0201]  35.5,2.12 180 bottom
X3:R22  [R0201]  36.38,3.14 270 bottom
X3:R23  [R0201]  37.25,1.25 270 top
X3:R24  [R0201]  37.14,3.13 270 bottom
X3:R25  [R0201]  37.12,2.09 270 bottom
X3:R26  [R0201]  37.12,1.09 90 bottom
X3:R27  [R0201]  28.25,2.38 270 top
X3:R28  [R0201]  36.38,1.09 90 bottom
X3:R29  [R0201]  37.25,2.25 90 top
X3:U$2  1051330011  [POS-5]  35.04,1.11 180 top
X4  SYSTEMI-SW  [SYSTEWI-BR1.SOIC8C]  3.49,11.1 180 bottom
X5  87758-0816  [87758-0816]  27.58,19.99 0 top
X6  87758-0616  [87758-0616]  28.57,35.03 0 top
X7  SYSTEMI-SE  [SYSTEWI-BR1.SOIC8C]  39.21,11.41 270 bottom
X8  STMI-CW/GPIO  [SYSTEWI-BR1.SOIC16]  36.05,29 180 bottom
X9  87758-0616  [87758-0616]  141.13,78.74 0 top  (outside the outline)
XA1  ARDUINO_UNO  [AU_PINS]  33,29 180 bottom

## Library data of the parts
A2:C1-A2:C3 A2:L1 A2:R1-A2:R3 A3:C3.1-A3:C3.5 A3:C3.XX A3:R3.3-A3:R3.6 A3:R3.9-A3:R3.11 A4:A1:R13 A4:A1:R14 A4:A1:R16 A4:C1 A4:F1 A4:L1 A4:R1-A4:R4 A5:C1 A5:C2 A5:C4-A5:C6 A5:R2-A5:R12 A6:C1-A6:C5 A6:R2 A6:R3 A7:C1-A7:C3 A7:R1-A7:R11 A9:C1-A9:C5 A9:R1 A9:R5 A10:C1 A10:R1-A10:R4 A10:R7 L1-L6 R1-R22 X3:R1-X3:R5 X3:R21-X3:R29 = rcl
A2:C4 A2:C5 A3:R3.1 A3:R3.2 A9:R2-A9:R4 = resistor
A2:U1 A3:U3.1 A5:U1 A6:U1 A7:U1 A7:U2 A9:U1 A11:U1 = kitt.ic
A3:☇1-A3:☇3 A5:☇1-A5:☇3 A5:☇6 A5:☇7 A6:☇1 A6:☇5 = testpad
A4:A1:OK2 = optocoupler; MF: FAIRCHILD SEMICONDUCTOR; MPN: 4N35; OC_FARNELL: 1328375; OC_NEWARK: 72K9946
A4:B3 = rectifier
A4:D1 A6:D1 = diode
A4:R5 A4:R6 = varistor
A5:R1 A6:L1 A6:R1 A9:L1 = kitt.psvs
A5:T1 A10:U1 D2 = kitt.ic; CC: XYX17
A6:T1 A6:T2 = zetex; OC_FARNELL: unknown; OC_NEWARK: unknown
A7:DCL1 A7:DCL2 A7:MEC1 A10:REF2 REF1 = kitt.refs
A7:J2 = con-molex; OC_FARNELL: unknown; OC_NEWARK: unknown
A7:LED1 A7:LED2 AMO BMO LED1-LED5 = led
A7:PAD1 A7:PAD2 = wirepad
A7:X1 = con-molex; MPN: 87758-0216; OC_FARNELL: unknown; OC_NEWARK: 94M1513
A7:Y1 = Ai_Passives
A7:⌁1-A7:⌁20 XA1 = kitt.con
JMP1 JMP2 = jump-0r-smd
JP1 = jumper
JP4 X1.2 = pinhead
S1 S3 = kitt.psvs; AVAILABILITY: Good; DESCRIPTION: Switch Slide ON None ON SPDT Side Slide 0.1A 28VAC 28VDC 0.4VA 10000Cycles Gull Wing SMD T/R; MF: NKK Switches; MP: SS312SAH4-R; PACKAGE: None; PRICE: 2.48 USD
S2 S6 = switch-dil; OC_FARNELL: unknown; OC_NEWARK: unknown
S4 = switch
S5 = switch-misc
SV1 SV2 = con-lstb; OC_FARNELL: unknown; OC_NEWARK: unknown
U$1 = marks
X1 = kitt.con; CC: XYX17
X2 X2.2 X2.3 = con-phoenix-254; OC_FARNELL: unknown; OC_NEWARK: unknown
X3:U$2 = kitt.con; AVAILABILITY: Good; DESCRIPTION: Conn Micro USB Type B RCP 5 POS 0.65mm Solder ST SMD 5 Terminal 1 Port Embossed T/R; MF: Molex; MP: 105133-0011; PACKAGE: None; PRICE: 0.60 USD
X4 X7 X8 = con-hht.systewi
X5 = con-molex; MF: MOLEX; MPN: 87758-0816; OC_FARNELL: 7472331; OC_NEWARK: 59J1556
X6 X9 = con-molex; MPN: 87758-0616; OC_FARNELL: 7472323; OC_NEWARK: 25M5667

## Nets
!CS0: A7:R1.2 A7:U1.1 A7:⌁14.P$1 XA1.IO.10
!CS1: A7:R8.2 A7:⌁13.P$1 XA1.IO.9
!RST: A5:U1.2 R2.2
+3V3: A3:C3.3.1 A3:C3.4.1 A3:C3.5.1 A3:R3.1.1 A3:R3.2.1 A3:R3.5.1 A3:R3.6.1 A3:R3.10.1 A3:U3.1.1 A3:U3.1.3 A3:U3.1.22 A3:U3.1.23 A7:C2.1 A7:C3.1 A7:LED1.A A7:LED2.A A7:R1.1 A7:R5.1 A7:R6.1 A7:R9.1 A7:U1.12 A7:U1.15 A7:U1.17 A7:X1.2 A7:⌁4.P$1 A11:U1.8 JP4.2 JP4.4 L2.1 R1.2 R6.2 R13.2 R14.2 X1.2.5 X1.2.6 X4.6 X6.5 X6.6 X7.6 X8.6
+4.1V: A5:R8.2 A5:T1.7 A5:T1.8 A5:U1.17 S1.3 SV2.1
+5V: A7:⌁5.P$1 A9:C2.1 A9:C3.1 A9:C4.1 A9:R1.2 A9:U1.6 A9:U1.9 L1.1 R7.2 R15.1 SV2.2 X2.3.2 X3:R23.2 X4.7 X5.2 X8.7
+18V: A2:C1.1 A2:L1.2 A4:B3.+ A4:C1.1 A4:F1.1 A4:L1.2 A4:R3.2 A4:R5.2 L4.1 R8.1 SV2.3
+24V: A7:⌁2.P$1
A2:ILIM: A2:R3.1 A2:U1.4
A2:VM: A2:C2.1 A2:C3.+ A2:C4.1 A2:L1.1 A2:U1.5
A3:CS_AG: A3:R3.1.2 A3:U3.1.7
A3:CS_M: A3:R3.2.2 A3:U3.1.8
A3:DEN_AG: A3:R3.10.2 A3:R3.11.1 A3:U3.1.13
A3:DRDY_M: A3:U3.1.9 A3:☇1.TP
A3:INT2_AG: A3:U3.1.12 A3:☇3.TP
A3:INT_M: A3:U3.1.10 A3:☇2.TP
A3:SDO_AG: A3:R3.3.1 A3:R3.6.2 A3:U3.1.5
A3:SDO_M: A3:R3.4.1 A3:R3.5.2 A3:U3.1.6
A3:↔C1: A3:C3.2.1 A3:U3.1.24
A3:↔CAP: A3:C3.1.1 A3:U3.1.21
A4:A1:GND: A4:A1:OK2.4 A4:A1:R14.1
A4:A1:MRXS: A4:A1:OK2.1
A4:A1:N$1: A4:A1:OK2.5 A4:A1:R13.1 A4:A1:R16.2
A4:A1:N$2: A4:A1:OK2.2 A4:A1:R14.2
A4:A1:N$3: A4:A1:OK2.6 A4:A1:R16.1
A4:A1:V+++: A4:A1:R13.2
A4:N$1: A4:D1.C A4:L1.1 A4:R1.2
A5:BGATE: A5:T1.2 A5:U1.18
A5:BIAS: A5:C4.1 A5:R11.2 A5:R12.2 A5:U1.1 A5:U1.13
A5:CC: A5:C1.2 A5:U1.25
A5:CL: A5:R9.2 A5:U1.8 A5:☇6.TP
A5:CSN: A5:R5.1 A5:T1.1 A5:U1.19
A5:CX: A5:R10.2 A5:U1.7
A5:IBMON: A5:C6.1 A5:U1.6 A5:☇7.TP
A5:IGATE: A5:R3.2 A5:T1.4 A5:U1.22
A5:IIMON: A5:C5.1 A5:U1.3
A5:IL: A5:U1.4 A5:☇3.TP
A5:N$4: A5:C1.1 A5:R2.1
A5:N$8: A5:R7.1 A5:R8.1 A5:U1.16
A5:OFB: A5:R4.1 A5:R6.2 A5:U1.21
A5:TMR: A5:U1.9 A5:☇1.TP
A5:↔CLN: A5:R1.K+ A5:U1.26
A5:↔FBG: A5:R6.1 A5:R7.2 A5:U1.15
A5:↔IN: A5:R1.K- A5:U1.27
A6:BG: A6:T2.4 A6:U1.13
A6:DDC.EXTVCC: A6:U1.15 A6:☇1.TP
A6:SW✳: A6:C3.2 A6:L1.2 A6:T1.1 A6:T1.2 A6:T1.3 A6:T2.5 A6:T2.6 A6:T2.7 A6:T2.8 A6:U1.11
A6:TG: A6:T1.4 A6:U1.10
A6:TRACK/SS: A6:C1.1 A6:U1.19
A6:~SENSE+: A6:L1.1 A6:R1.-
A6:↔BOOST: A6:C3.1 A6:D1.C A6:U1.12
A6:↔ILIM: A6:C2.1 A6:D1.A A6:U1.14 A6:U1.18 A6:☇5.TP
A6:↔SENSE+: A6:R1.K+ A6:U1.6
A6:↔SENSE-: A6:R1.K- A6:U1.5
A6:↔VFB: A6:R2.2 A6:R3.1 A6:U1.7
A7:!PD: A7:R6.2 A7:R8.1 A7:U1.7
A7:LEDCTRL: A7:U1.5 A7:U2.2
A7:N$1: A7:LED2.K A7:R11.2
A7:N$2: A7:LED1.K A7:R10.2
A7:N$5: A7:C1.1 A7:U1.13
A7:N$6: A7:C1.2 A7:U1.14
A7:OD\!SHUT: A7:R7.1 A7:R10.1 A7:R11.1 A7:U2.6
A7:RST: A7:R5.2 A7:U1.6 A7:U2.3
A7:SHUT: A7:R7.2 A7:X1.1
A7:U1.GUARD: A7:U1.9 A7:Y1.2
A7:U1.MISO: A7:R2.2 A7:U1.2
A7:U1.MOSI: A7:R4.2 A7:U1.4
A7:U1.OSCIN✳: A7:U1.10 A7:Y1.1
A7:U1.OSCOUT✳: A7:U1.8 A7:Y1.3
A7:U1.SCLK: A7:R3.2 A7:U1.3
A9:CC: A9:C5.1 A9:R2.2 A9:U1.4
A9:✳SW: A9:L1.2 A9:U1.2
A10.!ACT: X5.7
A10:COMP: A10:C1.1 A10:R1.1
A10:HYST: A10:R2.2 A10:R7.2 A10:U1.5
A10:IN+&REF: A10:R1.2 A10:R2.1 A10:U1.3 A10:U1.6
A10:IN-: A10:R3.2 A10:R4.1 A10:U1.4
AUX.USB/D+_P: JMP2.1 X3:R24.1
AUX.USB/D-_N: JMP1.1 X3:R25.1
CORE.ADCX: A7:⌁8.P$1
CORE.ADCY: A7:⌁9.P$1
DDC.CLN/VIN: A5:R1.+ A6:C5.1 A6:T1.5 A6:T1.6 A6:T1.7 A6:T1.8 A6:U1.17
GND: A2:C1.2 A2:C2.2 A2:C3.- A2:C5.2 A2:R1.2 A2:R2.2 A2:R3.2 A2:U1.1 A2:U1.7 A2:U1.THERMAL A3:C3.1.2 A3:C3.2.2 A3:C3.3.2 A3:C3.4.2 A3:C3.5.2 A3:C3.XX.2 A3:R3.3.2 A3:R3.4.2 A3:R3.9.2 A3:R3.11.2 A3:U3.1.14 A3:U3.1.15 A3:U3.1.16 A3:U3.1.17 A3:U3.1.18 A3:U3.1.19 A3:U3.1.20 A4:C1.2 A4:R2.1 A4:R4.1 A4:R5.1 A5:C2.2 A5:C4.2 A5:C5.2 A5:C6.2 A5:R9.1 A5:R10.1 A5:U1.10 A5:U1.28 A5:U1.EP-NE A5:U1.EP-NW A5:U1.EP-SE A5:U1.EP-SW A6:C1.2 A6:C2.2 A6:C4.- A6:C5.2 A6:R3.2 A6:T2.1 A6:T2.2 A6:T2.3 A6:U1.2 A6:U1.3 A6:U1.16 A6:U1.21 A7:C2.2 A7:C3.2 A7:U1.16 A7:U1.19 A7:U2.1 A7:U2.4 A7:⌁1.P$1 A7:⌁10.P$1 A9:C1.2 A9:C2.2 A9:C3.2 A9:C4.2 A9:C5.2 A9:R2.1 A9:R3.1 A9:U1.1 A9:U1.5 A10:C1.2 A10:R3.1 A10:R7.1 A10:U1.1 A10:U1.2 A10:U1.EP A11:U1.4 AMO.C BMO.C D2.1 L3.2 LED1.C LED2.C LED3.C LED4.C LED5.C R11.1 R12.1 SV1.4 SV2.4 X1.2 X1.2.1 X1.2.2 X1.4 X2.2 X2.3.1 X3:R1.1 X3:R1.2 X3:R2.1 X3:R2.2 X3:R3.1 X3:R3.2 X3:R4.1 X3:R4.2 X3:R5.2 X3:R26.1 X3:R28.1 X3:U$2.5 X4.5 X5.4 X5.6 X5.8 X7.5 X8.5 XA1.GND2 XA1.GND3 XA1.GND.1
ITH: A5:R2.2 A5:U1.24 A6:U1.8
LAP: X1.2.3 XA1.IO.2
MISO: A7:R2.1 A7:⌁16.P$1 XA1.IO.11
MOSI: A7:R4.1 A7:⌁15.P$1 XA1.IO.12
N$2: A11:U1.3 JP4.1
N$3: A11:U1.7 JP4.3
N$4: LED1.A R8.2
N$5: L3.1 L6.1 X2.2.2
N$6: A11:U1.2 R11.2 R13.1
N$7: A11:U1.5 R12.2 R14.1
N$9: LED2.A R1.1
N$16: LED3.A R15.2
N$17: A4:B3.AC1 L6.2
N$18: XA1.ADC.1
N$19: XA1.ADC.0
N$31: LED4.A R16.1
N$32: LED5.A R17.1
N$33: R17.2 X4.1
N$34: AMO.A R18.1
N$35: BMO.A R19.1
PWR.MOTA: A2:R2.1 A2:U1.2 R19.2 XA1.IO.5
PWR.MOTB: A2:R1.1 A2:U1.3 R18.2 XA1.IO.6
SCLK: A7:R3.1 A7:⌁17.P$1 XA1.IO.13
SYSTWI.!INT: A3:C3.XX.1 A3:R3.9.1 A3:U3.1.11 A7:⌁20.P$1 R5.1 SV1.3 X4.4 X7.4 X8.4 XA1.IO.8
SYSTWI.SCL: A3:U3.1.2 A7:⌁19.P$1 R3.1 SV1.1 X4.2 X7.2 X8.2 XA1.SCL
SYSTWI.SDA: A3:U3.1.4 A7:⌁18.P$1 R4.1 SV1.2 X4.3 X7.3 X8.3 XA1.SDA
SYSTWI.VBUS: R3.2 R4.2 R5.2 R6.1 R7.1 R20.1 X7.1
TACH: X1.2.4 XA1.IO.3
TOP.5VEN: A9:R3.2 A9:R4.1 A9:R5.1 A9:R5.2 A9:U1.7 A10:U1.8 X5.3
TOP.!CHRG: A5:R11.1 A5:U1.12
TOP.!FLT: A5:R12.1 A5:U1.11
TOP.!RST: A7:R9.2 A7:U2.5 A7:⌁6.P$1 L5.1 R2.1 X6.4
TOP.BAT+NTC: A5:U1.14 X1.3
TOP.BAT/CON: D2.2 S1.2 X1.1
TOP.ENC: A5:U1.5 A5:☇2.TP
TOP.FREQ: A6:U1.20 X5.5
TOP.INACT: A9:R1.1 A9:U1.8
TOP.MODE: A6:U1.1 X6.3
TOP.MOT-: A2:U1.8 X2.1
TOP.MTXS: A7:PAD2.1 A7:⌁12.P$1 JMP2.3
TOP.MVPRW: A4:R3.1 A4:R4.2
TOP.ODA: A11:U1.1 XA1.IO.4
TOP.ODB: A11:U1.6 XA1.IO.7
TOP.OS1IS2: A5:T1.3 A5:U1.23 A6:C4.+ A6:R1.+ A6:R2.1
TOP.PGOOD: A6:U1.9 X6.1
TOP.RRX: A4:R1.1 A4:R2.2 A7:PAD1.1 A7:⌁11.P$1 JMP1.3
TOP.RUN: A6:U1.4 X6.2
UNO.3V3: L2.2 XA1.3.3V
UNO.5V: L1.2 XA1.5V
UNO.ADC3: XA1.ADC.3
UNO.ADC4: XA1.ADC.4
UNO.ADC5: XA1.ADC.5
UNO.RESET: L5.2 XA1.RESET
UNO.RX: JMP1.2 XA1.IO.0
UNO.TX: JMP2.2 XA1.IO.1
UNO.VIN: L4.2 XA1.VIN
VBP: X7.8
VBUS: X8.1
VCC/2: A4:B3.AC2 A4:D1.A A7:⌁7.P$1 X2.2.1
VF+OUT/IPC: A4:F1.2 S3.3
VF+OUT/SWITCH: A5:R1.- S3.1 S3.2
VSYS: A5:C2.1 A5:R3.1 A5:R4.2 A5:R5.2 A5:T1.5 A5:T1.6 A5:U1.20 A7:⌁3.P$1 A9:C1.1 A9:L1.1 A9:R4.2 A9:U1.3 A10:R4.2 A10:U1.7 R16.2 R20.2 X3:R29.2 X4.8 X5.1 X8.8
VTL: X7.7
X3:B-ID: X3:R5.1 X3:R27.2 X3:U$2.4
X3:N$5: X3:R22.2 X3:R24.2
X3:N$6: X3:R21.2 X3:R25.2 X3:R26.2 X3:R28.2
X3:O>D+: X3:R22.1 X3:U$2.3
X3:O>D-: X3:R21.1 X3:U$2.2
X3:O>VBUS: X3:R23.1 X3:R27.1 X3:R29.1 X3:U$2.1
✳TOP.MOT+: A2:C4.2 A2:C5.1 A2:U1.6 X2.3